# Altium PCB PCB_stm32f103c8.PcbDoc
Units mm, origin at the board's own origin, x right, y up, seen from the top; angles counter-clockwise.
Board outline 37.34 x 53.85 mm, 2 copper layers (Top Layer, Bottom Layer), stack 1.57 mm thick; 36 components, 51 nets, 172 pads, 17 vias.
Unrouted connection lines stored in the file: 1.
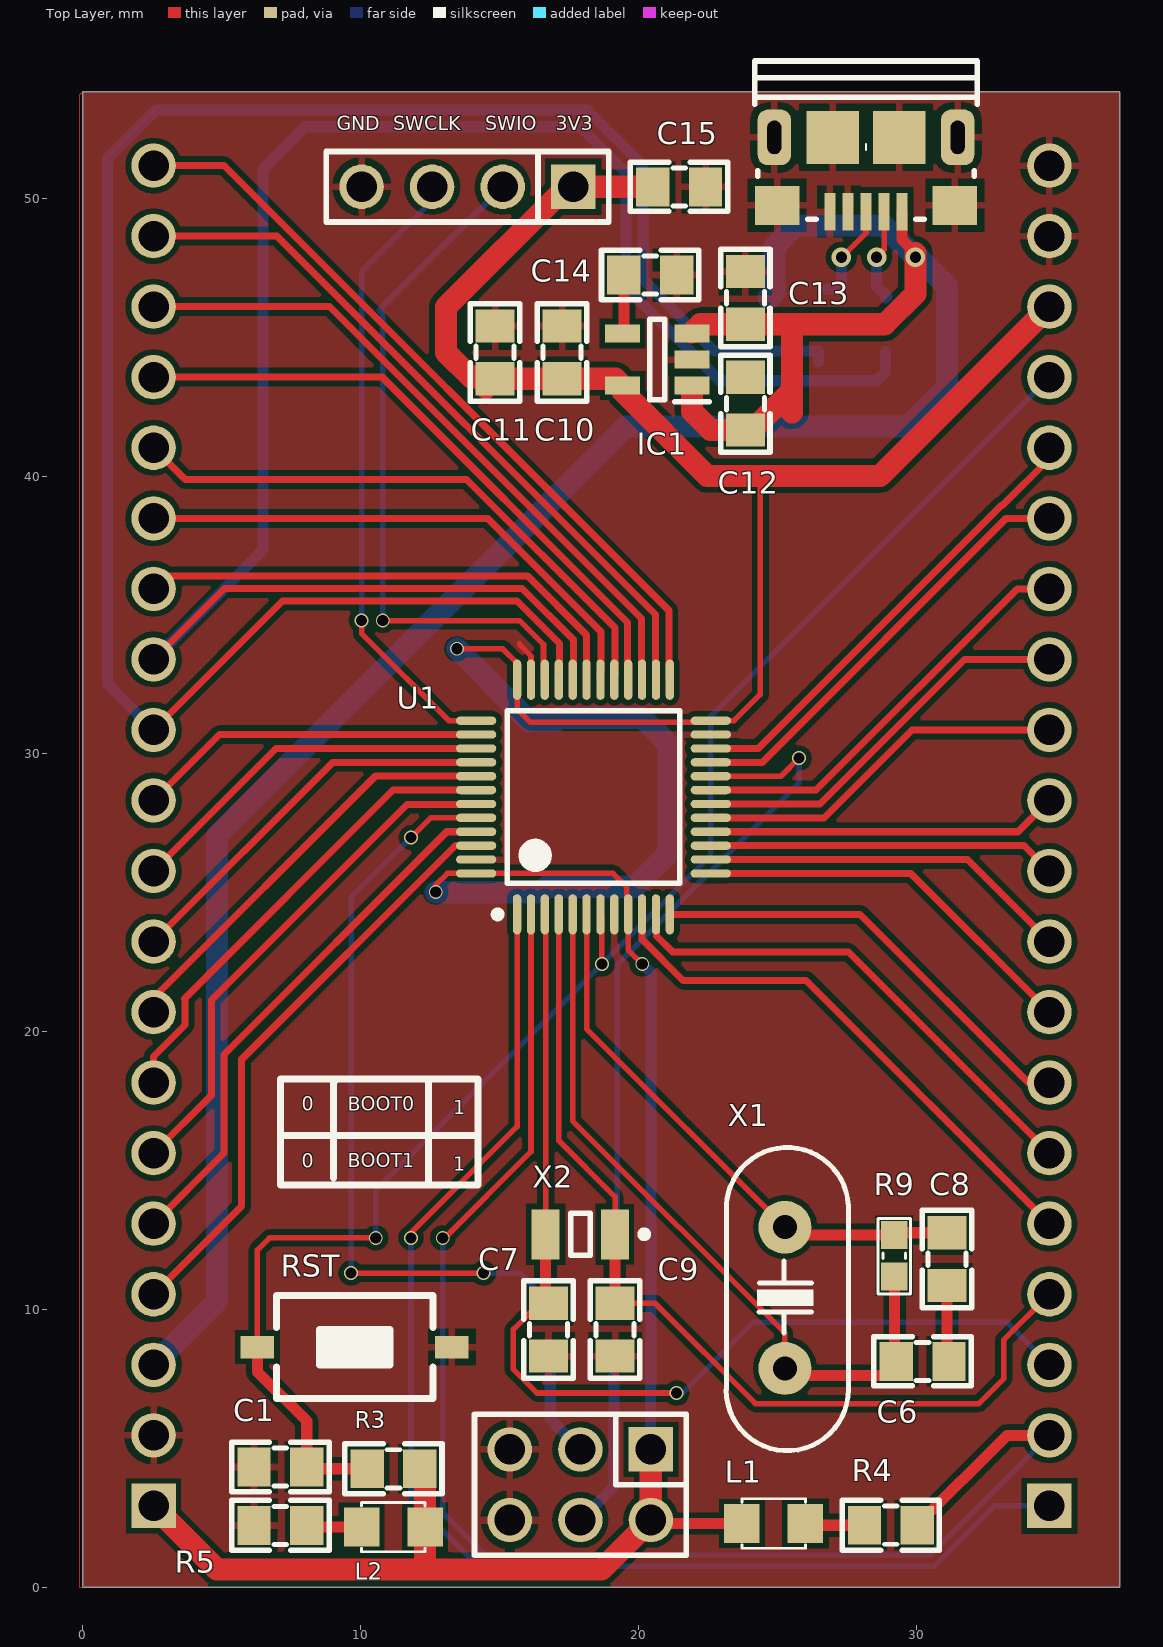
[diagram p0: Top Layer view]
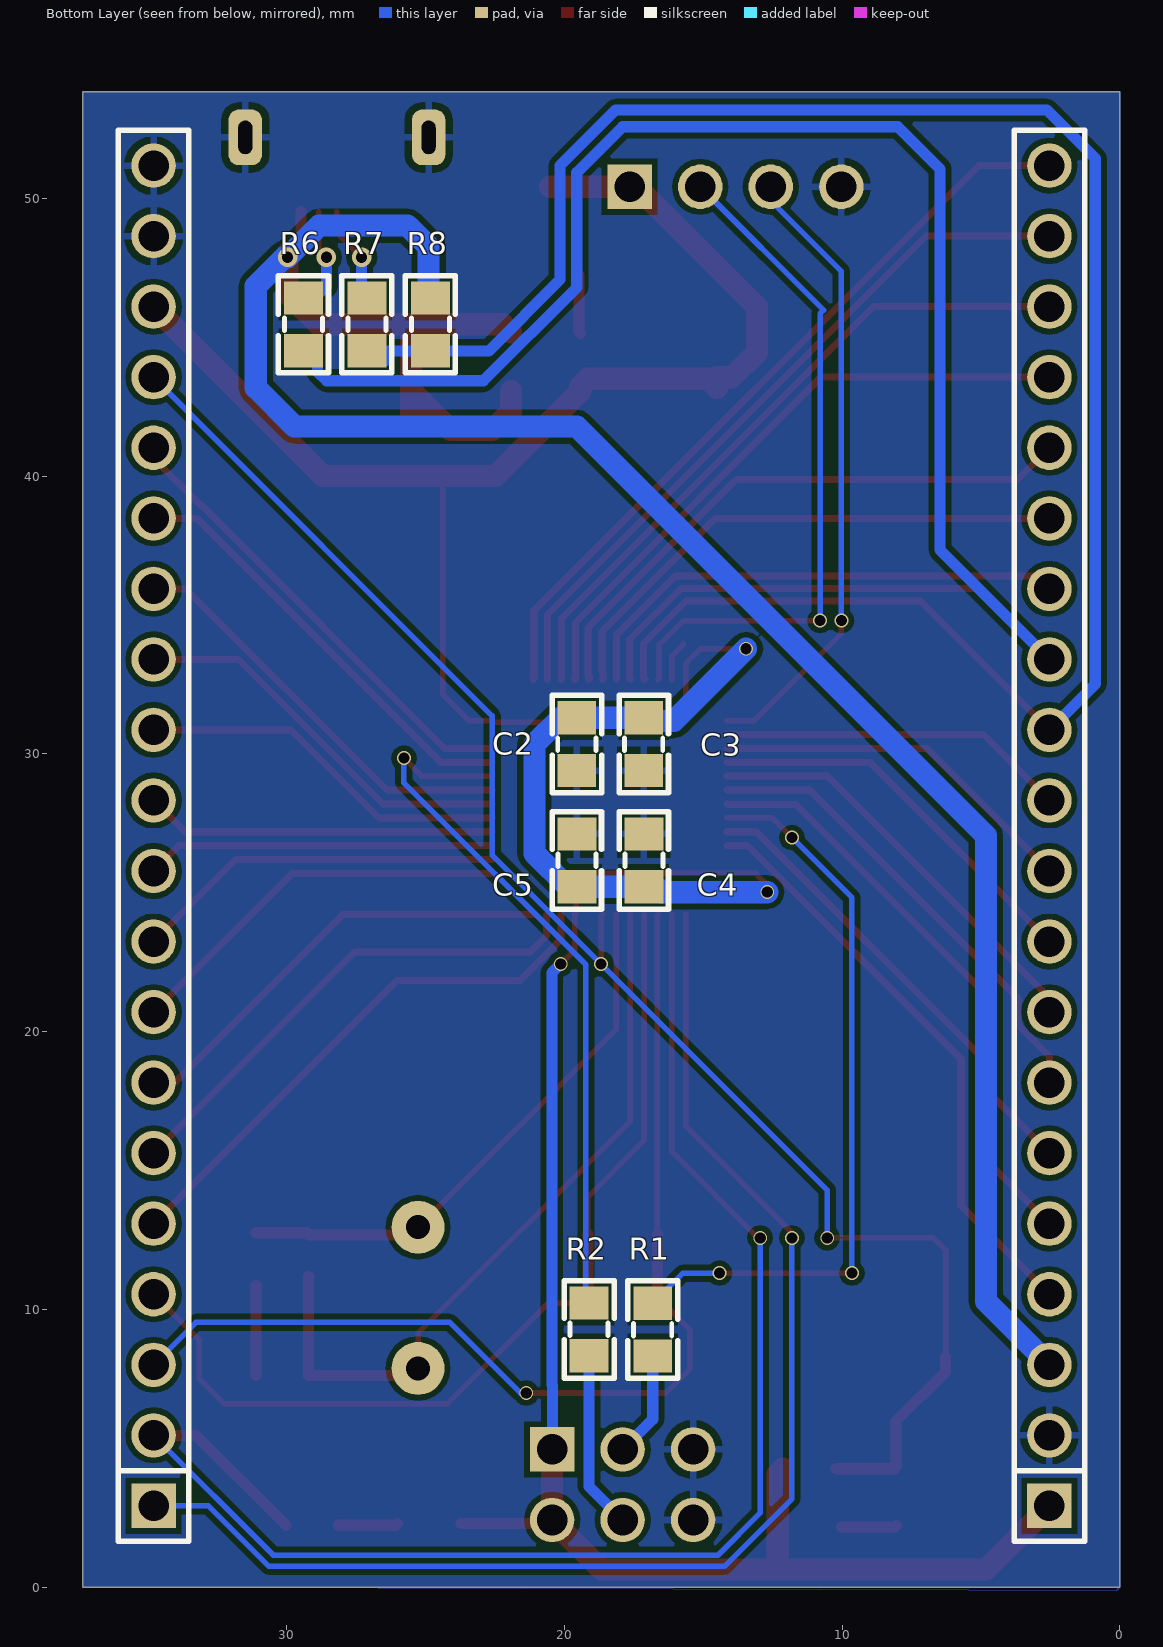
[diagram p1: Bottom Layer view, seen from below]
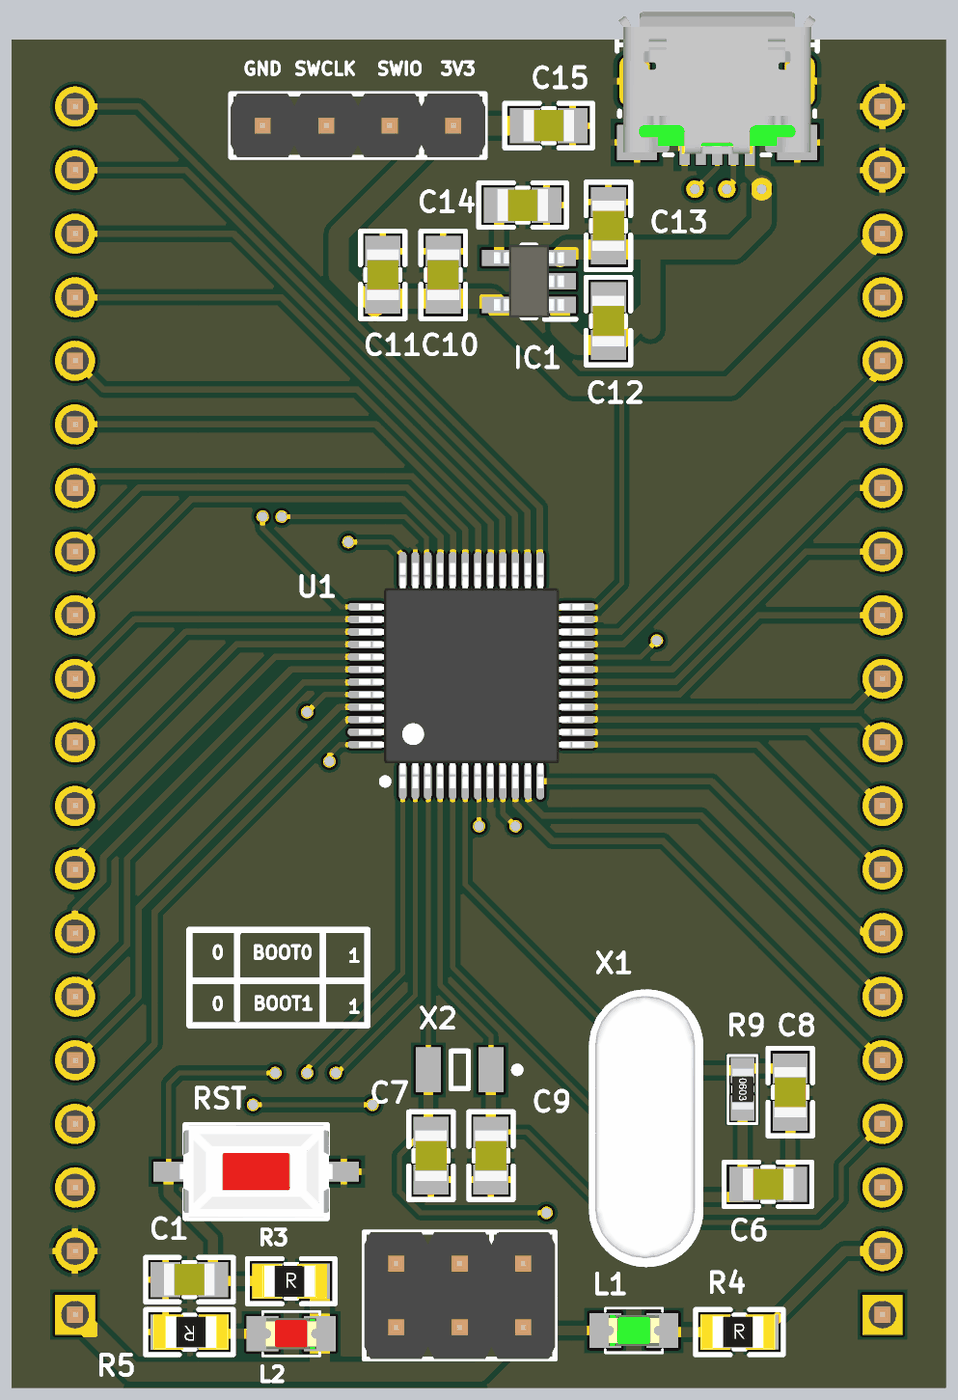
[diagram p2: 3D render of the assembled board from above, using the file's embedded part models]
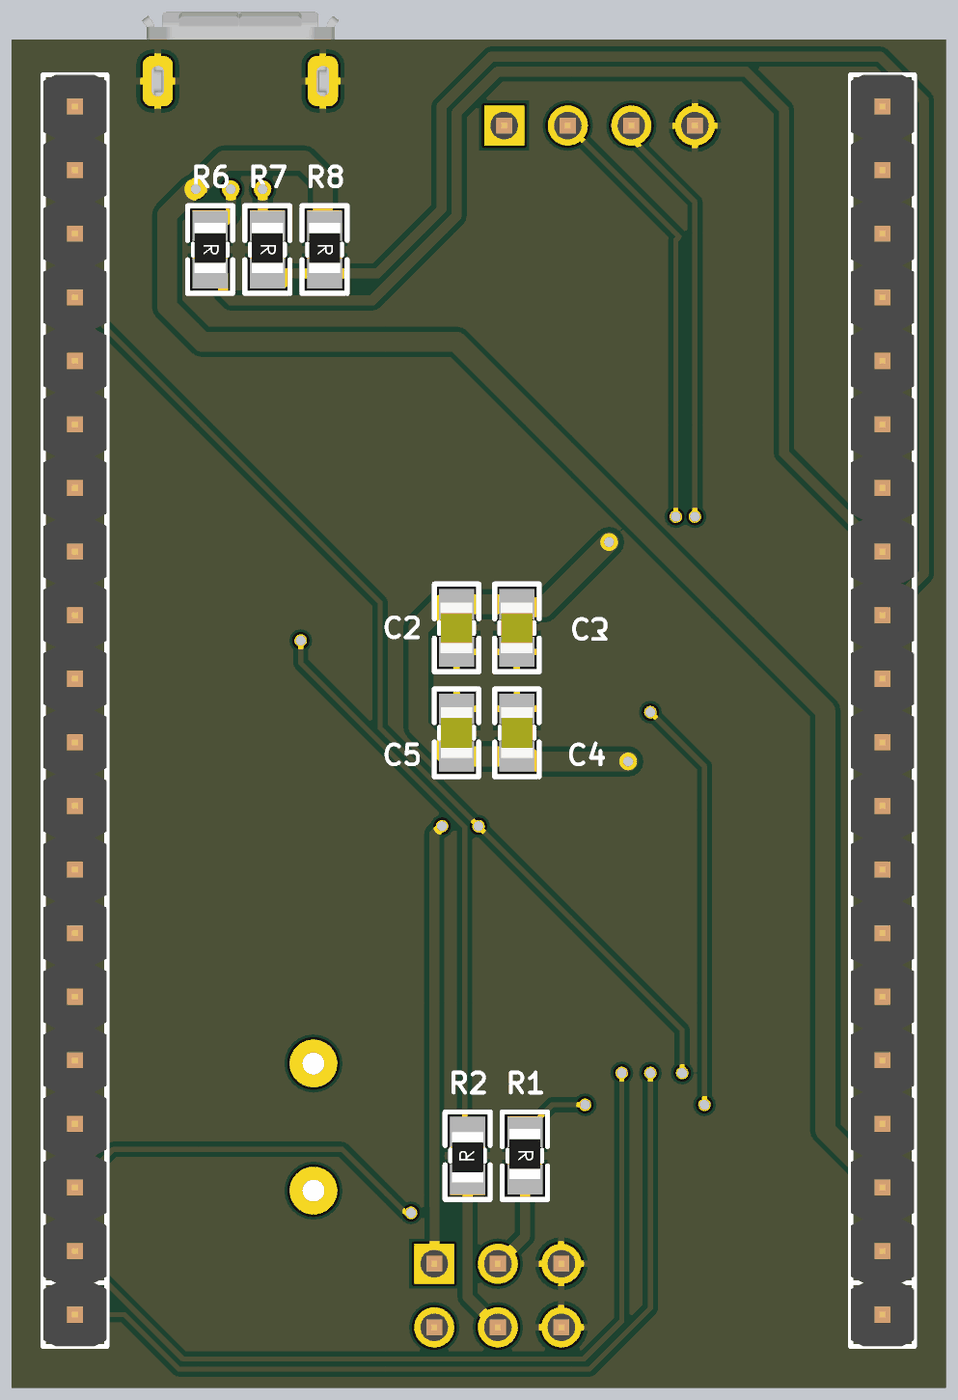
[diagram p3: 3D render of the assembled board from below, using the file's embedded part models]

## Layer stack, top to bottom
Top Solder: solder mask 0.01, Solder Resist, Dk 3.5
Top Layer: signal copper 0.035
Dielectric 1: dielectric 1.5, FR-4, Dk 4.8
Bottom Layer: signal copper 0.035
Bottom Solder: solder mask 0.01, Solder Resist, Dk 3.5

## Board outline
0,0 37.338,0 37.338,53.848 0,53.848

## Design rules (kind name [scope] priority, off if disabled: settings)
Clearance [All] p1: gap=0.2 ignorepadtopadclearanceinfootprint=FALSE
PolygonConnect [All] p1: connectstyle=Relief reliefconductorwidth=0.254 reliefentries=4 polygonreliefangle="90 Angle" airgapwidth=0.254
RoutingVias [All] p1: holewidth=0.3 width=0.6 viastyle="Through Hole" minholewidth=0.2 minwidth=0.4 maxholewidth=0.4 maxwidth=1
SolderMaskExpansion [All] p1: expansion=0.102
Width [All] p1: maxlimit=0.8 minlimit=0.2 preferedwidth=0.4
30 further rules are at their usual default settings.

## Classes and differential pairs
component class Sch_stm32f103c8: BOOT0 C1 C2 C3 C4 C5 C6 C7 C8 C9 C10 C11 C12 C13 C14 C15 IC1 L1 L2 R1 R2 R3 R4 R5 R6 R8 R9 RST U1 X1 X2 ""

## Components (designator, comment, footprint, x,y, rotation, side; value= is the part's Value field where it differs from the comment)
BOOT0 "JP 2x3 2.54" "JP 2x3 DT" 17.907,3.683 r180 top (schematic designator JP1)
C1 "105" "tu 0805" 7.112,4.318 r180 top
C2 "104" "tu 0805" 19.555,30.353 r270 bottom
C3 "104" "tu 0805" 17.145,30.353 r270 bottom
C4 "104" "tu 0805" 17.145,26.162 r90 bottom
C5 "104" "tu 0805" 19.558,26.162 r90 bottom
C6 "20pF" "tu 0805" 30.226,8.128 r0 top
C7 "20pF" "tu 0805" 16.764,9.271 r270 top
C8 "20pF" "tu 0805" 31.115,11.811 r270 top
C9 "20pF" "tu 0805" 19.16,9.271 r270 top
C10 "106" "tu 0805" 17.247,44.45 r90 top
C11 "104" "tu 0805" 14.834,44.45 r90 top
C12 "105" "tu 0805" 23.847,42.607 r90 top
C13 "104" "tu 0805" 23.847,46.412 r90 top
C14 "22nF" "tu 0805" 20.422,47.244 r0 top
C15 "104" "tu 0805" 21.463,50.419 r0 top
IC1 "RT9193-33GB" SOT94P279X130-5N 20.676,44.196 r180 top
JP2 "JP 1x20 2.54" "JP 1x20 DT" 34.798,2.921 r90 bottom
JP3 "JP 1x20 2.54" "JP 1x20 DT" 2.54,2.921 r90 bottom
JP4 "SWD" "JP 1x4 DT" 17.653,50.419 r180 top
L1 "LED 0805" LED-0805-Green 23.724,2.286 r0 top
L2 "LED 0805" LED-0805-Red 12.319,2.159 r180 top
R1 "100k" "tro smd 0805" 16.764,9.271 r270 bottom
R2 "100k" "tro smd 0805" 19.177,9.271 r90 bottom
R3 "10k" "tro smd 0805" 11.176,4.318 r0 top
R4 "560R" "tro smd 0805" 29.083,2.286 r0 top
R5 "560R" "tro smd 0805" 7.112,2.159 r180 top
R6 "22R" "tro smd 0805" 29.337,45.466 r270 bottom
R7 "22R" "tro smd 0805" 27.051,45.466 r270 bottom
R8 "4.7k" "tro smd 0805" 24.765,45.466 r270 bottom
R9 "1M" "tro smd 0603" 29.21,11.926 r270 top
RST "Nut Nhan 2 Chan SMD 3x6x2.5" "Nut Nhan 2 Chan SMD 3x6x2.5" 9.779,8.636 r180 top
U1 "STM32F103xx_LQFP48" STM32_LQPF48 18.381,28.444 r90 top
USB1 "USB Micro 5p DIP" "USB Micro 5p DIP" 28.194,52.197 r180 top
X1 "8Mhz" XT2 25.273,10.414 r270 top value=4Mhz
X2 "32,768KHz" XT2-32.768KHz-2_V 17.907,12.7 r180 top value=4Mhz

## Footprints (in the part's own frame and the unit in brackets; to place one, negate y for a bottom-side part, rotate by r counter-clockwise, add the part's x,y. Pads: shape width x height; smd on the part's side, far side on the other; paste and mask are expansions set on the pad)
"JP 1x4 DT" [mm] "4 pins, 1 row, straight, gold plating"
  rect 1.6x1.6 hole 1.1: 1(0,0)
  round 1.6 hole 1.1: 2(2.54,0) 3(5.08,0) 4(7.62,0)
  silkscreen extent -1.27,-1.27 8.89,1.27, body extent -1.27,-1.27 8.89,1.27, height 8.54
"JP 1x20 DT" [mm] "20 pins, 1 row, straight, gold plating"
  rect 1.6x1.6 hole 1.1: 1(0,0)
  round 1.6 hole 1.1: 2(2.54,0) 3(5.08,0) 4(7.62,0) 5(10.16,0) 6(12.7,0) 7(15.24,0) 8(17.78,0) 9(20.32,0) 10(22.86,0) 11(25.4,0) 12(27.94,0) 13(30.48,0) 14(33.02,0) 15(35.56,0) 16(38.1,0) 17(40.64,0) 18(43.18,0) 19(45.72,0) 20(48.26,0)
  silkscreen extent -1.27,-1.27 49.53,1.27, body extent -1.27,-1.27 49.53,1.27, height 8.54
"JP 2x3 DT" [mm]
  rect 1.6x1.6 hole 1.1: 1(-2.54,-1.27)
  round 1.6 hole 1.1: 2(0,-1.27) 3(2.54,-1.27) 4(2.54,1.27) 5(0,1.27) 6(-2.54,1.27)
  silkscreen extent -3.81,-2.54 3.81,2.54, body extent -3.81,-2.54 3.81,2.54, height 8.55
LED-0805-Green [mil]
  rect 50x55 smd: 1(0,0) 2(90,0)
  silkscreen extent 0,-35 90,35, body extent 5,-25 85,25, height 43
LED-0805-Red [mil]
  rect 50x55 smd: 1(0,0) 2(90,0)
  silkscreen extent 0,-35 90,35, body extent 5,-25 85,25, height 43
"Nut Nhan 2 Chan SMD 3x6x2.5" [mm] "Switch SMD type"
  rect 1.2x0.8 smd: 1(-3.5,0) 2(3.5,0)
  silkscreen extent -2.82,-1.85 2.82,1.85, body extent -3.05,-1.85 3.05,1.85, height 2.5
SOT94P279X130-5N [mm]
  rect 1.25x0.65 smd: 1(-1.25,0.94) 2(-1.25,0) 3(-1.25,-0.94) 4(1.25,-0.94) 5(1.25,0.94)
  silkscreen extent -1.88,-1.45 0.28,1.51, body extent -1.4,-1.45 1.4,1.45, height 1.3
STM32_LQPF48 [mm]
  oval 1.45x0.3 smd: 1(-4.225,2.75) 2(-4.225,2.25) 3(-4.225,1.75) 4(-4.225,1.25) 5(-4.225,0.75) 6(-4.225,0.25) 7(-4.225,-0.25) 8(-4.225,-0.75) 9(-4.225,-1.25) 10(-4.225,-1.75) 11(-4.225,-2.25) 12(-4.225,-2.75) 25(4.225,-2.75) 26(4.225,-2.25) 27(4.225,-1.75) 28(4.225,-1.25) 29(4.225,-0.75) 30(4.225,-0.25) 31(4.225,0.25) 32(4.225,0.75) 33(4.225,1.25) 34(4.225,1.75) 35(4.225,2.25) 36(4.225,2.75)
  oval 0.3x1.45 smd: 13(-2.75,-4.225) 14(-2.25,-4.225) 15(-1.75,-4.225) 16(-1.25,-4.225) 17(-0.75,-4.225) 18(-0.25,-4.225) 19(0.25,-4.225) 20(0.75,-4.225) 21(1.25,-4.225) 22(1.75,-4.225) 23(2.25,-4.225) 24(2.75,-4.225) 37(2.75,4.225) 38(2.25,4.225) 39(1.75,4.225) 40(1.25,4.225) 41(0.75,4.225) 42(0.25,4.225) 43(-0.25,4.225) 44(-0.75,4.225) 45(-1.25,4.225) 46(-1.75,4.225) 47(-2.25,4.225) 48(-2.75,4.225)
  silkscreen extent -4.35,-3.1 3.1,3.57, body extent -4.5,-4.5 4.5,4.5, height 1.6
"tro smd 0603" [mm] "Chip Capacitor, 2-Leads, Body 1,60x0,80mm, IPC Medium Density"
  rect 1x0.95 smd mask+0.076: 1(-0.75,0) 2(0.75,0)
  silkscreen extent -1.35,-0.58 1.37,0.58, body extent -0.82,-0.42 0.82,0.43, height 0.44
"tro smd 0805" [mm]
  rect 1.2x1.4 smd: 1(-0.946,-0.061) 2(0.954,-0.061)
  silkscreen extent -1.75,-0.97 1.75,0.84, body extent -1.56,-0.76 1.44,0.64, height 0.53
"tu 0805" [mm] "Compoment SMD 80x50mil"
  rect 1.2x1.4 smd: 1(-0.946,-0.003) 2(0.954,-0.003)
  silkscreen extent -1.75,-0.89 1.75,0.89, body extent -1.01,-0.64 1.01,0.63, height 0.61
"USB Micro 5p DIP" [mm]
  rect 0.4x1.35 smd mask+0.05: 1(-1.3,2.675) 2(-0.65,2.675) 3(0,2.675) 4(0.65,2.675) 5(1.3,2.675)
  rrect60% 1.2x2 hole 0.5 slot 1.2 at 90 deg: 5(-3.3,0) 5(3.3,0)
  rect 1.6x1.4 smd: 5(-3.2,2.45) 5(3.2,2.45)
  rect 1.9x1.9 smd paste-10: 5(-1.2,0) 5(1.2,0)
  silkscreen extent -4,-2.75 4,2.95, body extent -3.93,-2.76 3.93,2.9, height 2.85
XT2 [mil] "Footpin for Crystal 2 pin"
  round 75 hole 34: 1(-100,0) 2(100,0)
  silkscreen extent -213,-83 217,90, body extent -216,-87 216,90, height 144
XT2-32.768KHz-2_V [mm] "Hand Drawn, 2-Leads, Body 3.2x1.5mm, Pitch 2.5mm"
  rect 1x1.8 smd: 1(-1.25,0) 2(1.25,0)
  silkscreen extent -2.43,-0.75 0.35,0.75, body extent -1.6,-0.75 1.6,0.75, height 0.9

## Part data
BOOT0: library part "JP 2x3 2.54 Duc Thang", "C?m", Chung_Loai=C?m, Don_Vi=Con, Ma_Hang=MH002686, Ten_Linh_Kien="Jump Ðôi Ð?c 2.54MM 2x40P Th?ng 11MM"
C1 C12: library part "Tu 0805 105 50V 10%", "Dán", Chung_Loai=Dán, Don_Vi=Con, Ma_Hang=MH004552, So_Chan=2, Ten_Linh_Kien="T? 0805 105-1uF 10% 50V"
C2 C3 C4 C5 C11 C13 C15: library part "Tu 0805 104 50V 10%", "Dán", Chung_Loai=Dán, Don_Vi=Con, Ma_Hang=MH004551, So_Chan=2, Ten_Linh_Kien="T? 0805 104-100nF 10% 50V"
C6 C7 C8 C9: library part "Tu 0805 20pF 50V 10%", "Dán", Chung_Loai=Dán, Don_Vi=Con, Ma_Hang=MH004558, So_Chan=2, Ten_Linh_Kien="T? 0805 20P 10% 50V"
C10: library part "Tu 0805 106 16V 10%", "Dán", Chung_Loai=Dán, Don_Vi=Con, Ma_Hang=MH004553, So_Chan=2, Ten_Linh_Kien="T? 0805 106-10uF 10% 16V"
C14: library part "Tu 0805 22nF 50V 20%", "Dán", Chung_Loai=Dán, Don_Vi=Con, Ma_Hang=MH007857, So_Chan=2, Ten_Linh_Kien="T? 0805 22nF 50V 20%"
IC1: "Integrated Circuit", Manufacturer_Name=RICHTEK, Datasheet Link=http://www.richtek.com/assets/product_file/RT9193/DS9193-17.pdf, Height=1.295mm, Manufacturer_Part_Number=RT9193-33GB
JP2 JP3: library part "JP 1x20 2.54 Duc Thang", "C?m", Chung_Loai=C?m, Don_Vi=Con, Ma_Hang=MH000903, Ten_Linh_Kien="Jump Ðon Ð?c 2.54MM 1x40P Th?ng 11MM"
JP4: library part "JP 1x4 2.54 Duc Thang", "C?m", Chung_Loai=C?m, Don_Vi=Con, Ma_Hang=MH000903, Ten_Linh_Kien="Jump Ðon Ð?c 2.54MM 1x40P Th?ng 11MM"
L1: library part "LED 0805 Xanh La", "Dán", Chung_Loai=Dán, Don_Vi=Con, Ma_Hang=MH002326, Ten_Linh_Kien="LED 0805 Màu Xanh Lá (Green)"
L2: library part "LED 0805 Do", "Dán", Chung_Loai=Dán, Don_Vi=Con, Ma_Hang=MH000897, Ten_Linh_Kien="LED 0805 Màu Ð? (Red)"
R1 R2: library part "Tro 0805 5% 100k", "Dán", Chung_Loai=Dán, Don_Vi=Con, Ma_Hang=MH005250, So_Chan=2, Ten_Linh_Kien="Tr? 0805 5% 100k"
R3: library part "Tro 0805 5% 10k", "Dán", Chung_Loai=Dán, Don_Vi=Con, Ma_Hang=MH005239, So_Chan=2, Ten_Linh_Kien="Tr? 0805 5% 10k"
R4 R5: library part "Tro 0805 5% 560R", "Dán", Chung_Loai=Dán, Don_Vi=Con, Ma_Hang=MH005261, So_Chan=2, Ten_Linh_Kien="Tr? 0805 5% 560R"
R6 R7: library part "Tro 0805 5% 22R", "Dán", Chung_Loai=Dán, Don_Vi=Con, Ma_Hang=MH005249, So_Chan=2, Ten_Linh_Kien="Tr? 0805 5% 22R"
R8: library part "Tro 0805 5% 4.7k", "Dán", Chung_Loai=Dán, Don_Vi=Con, Ma_Hang=MH005307, So_Chan=2, Ten_Linh_Kien="Tr? 0805 5% 4.7k"
R9: library part "Tro 0603 5% 1M", "Dán", Chung_Loai=Dán, Don_Vi=Con, Ma_Hang=MH006909, So_Chan=2, Ten_Linh_Kien="Tr? 0603 5% 1M"
USB1: "USB Type B", Ma_Hang=MH005145, Ten="MicroUSB MK5P DIP"
X1 X2: library part XT2, "Crystal, 32.768 KHz, -40 to 85 degC, 3.2 x 1.5 x 0.9 mm SMD"
RST: Ma_Hang=MH001036, Ten="Nút Nh?n 2 Chân 3x6x2.5MM SMD"
U1: ComponentLink1Description="Manufacturer Link", ComponentLink1URL=www.st.com/stm32, ComponentLink2Description=Datasheet, ComponentLink2URL=http://www.st.com/stonline/products/literature/ds/13587.pdf, DatasheetVersion="rev6, Mar-2008", PackageDescription="48-Pin Low-Profile Quad Flat Pack, 7 x 7 mm Body, 0.5 mm Pitch (LQFP48)", PackageReference=LQFP48, PackageVersion=Mar-2008, Published=30-May-2008, Publisher="Altium Limited"

## Via types
v1: diameter 0.5, hole 0.4, Top Layer to Bottom Layer, 14 vias
v2: diameter 0.7, hole 0.4, Top Layer to Bottom Layer, 3 vias

## Nets (pads, with @x,y where several pads share a name; then routed paths per layer and width w, separated by ;. In a path a pad name is that pad's centre, name@x,y a point inside that pad or via, vN(x,y) a via of type N, cw(c..) or ccw(c..) an arc to the next point about the centre after c; other vN are vias at no path point)
+5V: C12.1 C13.1 IC1.1 IC1.3 JP3.3 R8.1 USB1.1 | length 86
  Top Layer w0.4: USB1.1 29.494,48.514 v2@29.845,48.163
  Top Layer w0.8: IC1.1@21.926,43.053 21.926,42.336 22.601,41.661 C12.1 24.099,41.661 25.527,43.089 ; IC1.3@21.926,45.167 22.225,45.466 C13.1 25.527,45.466 ; 25.527,42.291 25.527,43.089 ; v2@29.972,48.036 v2(29.972,47.879) 29.972,46.568 28.87,45.466 25.527,45.466 ; 25.527,43.089 25.527,45.466
  Bottom Layer w0.8: JP3.3 4.826,10.287 4.826,27.051 19.558,41.783 29.718,41.783 31.115,43.18 31.115,46.843 30.079,47.879 v2(29.972,47.879) 28.829,49.022 25.654,49.022 24.894,48.262 24.894,46.611 R8.1@24.695,46.412
BOOT0: R1.1 U1.44 | length 26.8
  Top Layer w0.2: v1(9.652,11.303) v1(14.42,11.303) ; v1(11.811,26.986) 12.519,27.694 U1.44
  Bottom Layer w0.2: v1(9.652,11.303) 9.652,24.827 v1(11.811,26.986) ; v1(14.42,11.303) 15.738,11.303 R1.1
BOOT1: R2.2 U1.20 | length 25.8
  Top Layer w0.2: U1.20 25.13,29.194 v1(25.781,29.845)
  Bottom Layer w0.2: R2.2 19.231,10.34 19.231,22.406 25.781,28.956 v1(25.781,29.845)
GND: BOOT0.3 BOOT0.4 C1.2 C2.2 C3.2 C4.2 C5.2 C7.2 C9.2 C10.2 C11.2 C12.2 C13.2 C14.2 C15.2 IC1.2 JP2.19 JP2.20 JP3.2 JP4.4 R5.2 RST.1 U1.8 U1.23 U1.35 U1.47 USB1.4 USB1.5 | length 1.5
  Top Layer w0.2: 15.723,33.958 15.723,33.929 16.131,33.521 U1.35
NetC6_2: C6.2 C8.2 | length 3.2
  Top Layer w0.4: C8.2 31.115,10.853 C6.2@31.115,7.62
NetC14_1: C14.1 IC1.4 | length 2.1
  Top Layer w0.4: IC1.4 19.476,45.186 C14.1
NetJP1_2: BOOT0.2 R1.2 | length 3.8
  Bottom Layer w0.4: R1.2 16.825,6.035 BOOT0.2
NetJP1_5: BOOT0.5 R2.1 | length 6.4
  Bottom Layer w0.4: BOOT0.5 19.116,3.622 R2.1
NetL1_2: L1.2 R4.1 | length 2.2
  Top Layer w0.4: L1.2 26.071,2.225 R4.1
NetL2_2: L2.2 R5.1 | length 2
  Top Layer w0.4: R5.1 8.118,2.159 L2.2
NetR6_1: R6.1 USB1.2 | length 3.4
  Top Layer w0.2: v2(28.575,47.879) 28.844,48.148 USB1.2
  Bottom Layer w0.4: v2(28.575,47.879) 28.575,46.829 28.941,46.463 R6.1@28.89,46.412
NetR7_1: R7.1 USB1.3 | length 3.7
  Top Layer w0.2: v2@27.305,47.867 28.194,48.756 USB1.3
  Bottom Layer w0.2: v2@27.305,47.623 v2@27.305,47.867
  Bottom Layer w0.4: R7.1@26.794,46.729 27.305,46.729 v2@27.305,47.623
  other v2: 27.305,47.879
OSCIN: C6.1 R9.2 U1.5 X1.2 | length 27.1
  Top Layer w0.2: U1.5 17.631,16.786 25.273,9.144 X1.2
  Top Layer w0.4: X1.2 25.527,7.62 29.215,7.62 29.215,11.171 R9.2
OSCOUT: C8.1 R9.1 U1.6 X1.1 | length 20.2
  Top Layer w0.2: U1.6 18.131,20.096 X1.1
  Top Layer w0.4: X1.1 25.551,12.676 R9.1 29.291,12.757 C8.1
PA0: JP2.5 U1.10 | length 19.8
  Top Layer w0.254: U1.10 20.131,23.323 21.61,21.844 26.035,21.844 JP2.5
PA1: JP2.6 U1.11 | length 18.2
  Top Layer w0.254: U1.11 20.654,24.196 20.654,23.442 21.236,22.86 27.559,22.86 JP2.6
PA2: JP2.7 U1.12 | length 16.2
  Top Layer w0.254: U1.12 27.978,24.219 34.036,18.161 JP2.7
PA3: JP2.8 U1.13 | length 14.3
  Top Layer w0.254: U1.13 29.805,25.694 JP2.8
PA4: JP2.9 U1.14 | length 13.4
  Top Layer w0.254: U1.14 31.845,26.194 JP2.9
PA5: JP2.10 U1.15 | length 12.6
  Top Layer w0.254: U1.15 33.885,26.694 JP2.10
PA6: JP2.11 U1.16 | length 12.7
  Top Layer w0.254: U1.16 33.671,27.194 JP2.11
PA7: JP2.12 U1.17 | length 13.5
  Top Layer w0.254: U1.17 26.678,27.694 29.845,30.861 JP2.12
PA8: JP3.16 U1.29 | length 21.2
  Top Layer w0.254: JP3.16 3.683,39.878 13.815,39.878 19.154,34.539 19.154,32.827 19.108,32.781 19.108,32.692 U1.29
PA9: JP3.15 U1.30 | length 19.6
  Top Layer w0.254: JP3.15 14.57,38.481 18.654,34.397 18.654,32.969 18.608,32.923 18.608,32.692 U1.30
PA10: JP3.14 U1.31 | length 18.3
  Top Layer w0.254: JP3.14 3.009,36.41 15.999,36.41 18.122,34.287 18.122,32.678 U1.31
PA11: JP3.13 R6.2 U1.32 | length 67.8
  Top Layer w0.254: JP3.13 5.095,35.956 15.811,35.956 17.654,34.113 17.654,32.692 U1.32
  Bottom Layer w0.4: JP3.13 6.477,37.338 6.477,51.054 8.001,52.578 17.907,52.578 19.558,50.927 19.558,46.797 22.921,43.434 28.575,43.434 28.89,43.749 R6.2@28.89,44.512
PA12: JP3.12 R7.2 R8.2 U1.33 | length 72.4
  Top Layer w0.254: JP3.12 7.181,35.502 15.623,35.502 17.154,33.971 17.154,32.738 17.108,32.692 U1.33
  Bottom Layer w0.4: JP3.12 0.889,32.512 0.889,51.435 2.632,53.178 18.156,53.178 20.158,51.176 20.158,47.082 22.728,44.512 R8.2 26.477,44.512 R7.2@26.477,44.135
PA15: JP3.11 U1.38 | length 12.6
  Top Layer w0.254: JP3.11 4.913,30.694 U1.38
PB0: JP2.13 U1.18 | length 14.3
  Top Layer w0.254: U1.18 26.536,28.194 31.743,33.401 JP2.13
PB1: JP2.14 U1.19 | length 15.2
  Top Layer w0.254: U1.19 26.394,28.694 33.641,35.941 JP2.14
PB3: JP3.10 U1.39 | length 13.4
  Top Layer w0.254: JP3.10 6.953,30.194 U1.39
PB4: JP3.9 U1.40 | length 14.3
  Top Layer w0.254: JP3.9 8.993,29.694 U1.40
PB5: JP3.8 U1.41 | length 15.4
  Top Layer w0.254: JP3.8 2.54,21.209 10.525,29.194 U1.41
PB6: JP3.7 U1.42 | length 17.1
  Top Layer w0.254: JP3.7 2.54,19.107 3.667,20.234 3.667,21.168 3.654,21.18 11.168,28.694 U1.42
PB7: JP3.6 U1.43 | length 18.8
  Top Layer w0.254: JP3.6 4.626,17.707 4.626,21.136 11.661,28.171 14.133,28.171 U1.43
PB8: JP3.5 U1.45 | length 19.5
  Top Layer w0.254: JP3.5 5.08,15.621 5.08,19.177 13.097,27.194 U1.45
PB9: JP3.4 U1.46 | length 21.4
  Top Layer w0.254: JP3.4 5.715,13.716 5.715,19.003 13.406,26.694 U1.46
PB10: JP2.15 U1.21 | length 15.8
  Top Layer w0.254: U1.21 24.457,29.694 33.244,38.481 JP2.15
PB11: JP2.16 U1.22 | length 16.9
  Top Layer w0.254: U1.22 24.315,30.194 33.056,38.935 33.095,38.935 34.798,40.638 JP2.16
PB12: JP3.20 U1.25 | length 27.7
  Top Layer w0.254: JP3.20 5.08,51.181 21.108,35.153 21.108,32.692 U1.25
PB13: JP3.19 U1.26 | length 26.1
  Top Layer w0.254: JP3.19 6.978,48.641 20.608,35.011 20.608,32.692 U1.26
PB14: JP3.18 U1.27 | length 24.4
  Top Layer w0.254: JP3.18 8.876,46.101 20.108,34.869 20.108,32.692 U1.27
PB15: JP3.17 U1.28 | length 22.8
  Top Layer w0.254: JP3.17 10.774,43.561 19.608,34.727 19.608,32.692 U1.28
PC13: JP2.2 R4.2 U1.2 | length 53.2
  Top Layer w0.2: v1@12.954,12.502 16.131,15.679 U1.2
  Top Layer w0.4: R4.2 33.273,5.461 JP2.2
  Bottom Layer w0.2: v1@12.954,12.502 12.954,2.667 14.478,1.143 30.48,1.143 JP2.2
  other v1: 12.954,12.573
PC14: C7.1 JP2.3 U1.3 X2.2 | length 38.5
  Top Layer w0.2: U1.3 16.657,24.193 X2.2 ; C7.1@16.657,10.32 C7.1 16.44,10.217 15.494,9.271 15.494,7.839 16.348,6.985 v1(21.376,6.985)
  Top Layer w0.4: C7.1@16.657,10.32 X2.2
  Bottom Layer w0.2: v1(21.376,6.985) 21.59,6.985 24.13,9.525 33.274,9.525 JP2.3
PC15: C9.1 JP2.4 U1.4 X2.1 | length 34.4
  Top Layer w0.2: U1.4 17.131,16.074 19.157,14.048 X2.1 ; C9.1 20.596,10.217 24.209,6.604 32.258,6.604 33.147,7.493 33.147,8.89 JP2.4
  Top Layer w0.4: C9.1 X2.1
RST: C1.1 JP2.17 R3.1 RST.2 U1.7 | length 58
  Top Layer w0.2: RST.2@6.279,8.255 6.279,12.136 6.716,12.573 v1(10.541,12.573) ; U1.7 18.681,24.169 v1(18.681,22.433)
  Top Layer w0.4: RST.2@6.279,8.255 6.279,7.747 8.058,5.968 C1.1 8.122,4.257 R3.1
  Bottom Layer w0.2: v1(10.541,12.573) 10.541,14.293 v1(18.681,22.433) 22.606,26.358 22.606,31.369 JP2.17
SWCLK: JP4.3 U1.37 | length 22.8
  Top Layer w0.2: v1(10.033,34.798) 10.033,34.33 13.169,31.194 U1.37
  Bottom Layer w0.2: v1(10.033,34.798) 10.033,47.371 12.446,49.784 12.192,50.038 JP4.3
SWIO: JP4.2 U1.34 | length 25
  Top Layer w0.2: v1(10.795,34.798) 15.723,34.798 16.581,33.94 16.581,32.731 16.637,32.675 U1.34
  Bottom Layer w0.2: v1(10.795,34.798) 10.795,45.847 10.668,45.974 JP4.2
VBAT: JP2.1 U1.1 | length 47.5
  Top Layer w0.2: v1(11.811,12.573) 11.811,12.756 15.631,16.576 U1.1
  Bottom Layer w0.2: v1(11.811,12.573) 11.811,3.175 14.243,0.743 30.646,0.743 32.824,2.921 JP2.1
VCC3V3: BOOT0.1 BOOT0.6 C2.1 C3.1 C4.1 C5.1 C10.1 C11.1 C15.1 IC1.5 JP2.18 JP3.1 JP4.1 L1.1 L2.1 R3.2 U1.9 U1.24 U1.36 U1.48 | length 138.2
  Top Layer w0.2: v1(12.7,25.019) 12.7,25.273 13.121,25.694 U1.48 19.085,25.694 19.581,25.198 19.581,24.269 U1.9 19.631,22.938 v1(20.136,22.433) ; v1(13.462,33.782) 15.113,33.782 15.631,33.264 U1.36 15.631,31.613 16.1,31.144 22.556,31.144 U1.24 23.447,31.194 24.384,32.131 24.384,40.005
  Top Layer w0.4: BOOT0.6 20.574,2.286 L1.1
  Top Layer w0.8: JP3.1 4.826,0.635 12.446,0.635 ; R3.2 12.319,4.069 L2.1 12.319,0.762 12.446,0.635 ; BOOT0.1 BOOT0.6 18.669,0.635 12.446,0.635 ; C15.1 20.514,50.419 JP4.1 17.404,50.419 13.074,46.089 13.074,44.457 13.97,43.561 14.513,43.561 14.513,43.18 C11.1 C10.1 19.177,43.504 IC1.5 19.426,43.058 22.479,40.005 24.384,40.005 28.702,40.005 JP2.18
  Bottom Layer w0.4: v1(20.136,22.433) 20.447,22.122 20.447,7.269 20.432,7.254 20.432,4.968 BOOT0.1
  Bottom Layer w0.8: v1(12.7,25.019) 16.51,25.019 16.707,25.216 C4.1 C5.1 19.882,25.216 21.082,26.416 21.082,30.353 20.136,31.299 C2.1 C3.1 17.028,31.178 16.066,31.178 v1(13.462,33.782)

## Polygon pours and split planes (outlines as drawn)
GND on Bottom Layer "bottom Layer-No Net" (solid, pour order 7): 0,0 37.338,0 37.338,53.848 0,53.848
no net on Bottom Layer "Bottom Layer-No Net" (solid, remove dead copper, pour order 3): 0,0 0.127,-0.127 37.338,0 37.338,53.848 0,53.848
GND on Top Layer "Top Layer-No Net1" (solid, pour order 10): 0,0 37.338,0 37.338,53.848 0,53.848
no net on Top Layer "Top Layer-No Net" (solid, remove dead copper, pour order 8): -0.127,0 37.338,0 37.338,53.848 0,53.848 -0.127,53.721

## Silkscreen, mask and mechanical layers (free items; w line width, h text height)
Top Overlay:
  lines w0.254: 7.112,16.256 14.224,16.256 ; 9.017,14.732 9.017,18.161 9.144,18.288 7.112,18.288 ; 12.446,14.605 12.446,18.161 ; 7.112,18.288 7.112,14.478 12.7,14.478 14.224,14.478 14.224,18.288 7.112,18.288
  text "GND" at 9.144,52.451 h0.5
  text "SWCLK" at 11.176,52.451 h0.5
  text "SWIO" at 14.478,52.451 h0.5
  text "3V3" at 17.018,52.451 h0.5
  text "0" at 7.874,17.145 h0.5
  text "1" at 13.335,17.018 h0.5
  text "BOOT1" at 9.525,15.113 h0.5
  text "0" at 7.874,15.088 h0.5
  text "1" at 13.335,14.986 h0.5